# Altium PCB SMP ASCII.PcbDoc
Units mil, origin at the board's own origin, x right, y up, seen from the top; angles counter-clockwise.
Board outline 1574.8 x 334.65 mil, 2 copper layers (Top Layer, Bottom Layer), stack 63.78 mil thick; 21 components, 11 nets, 62 pads, 30 vias.
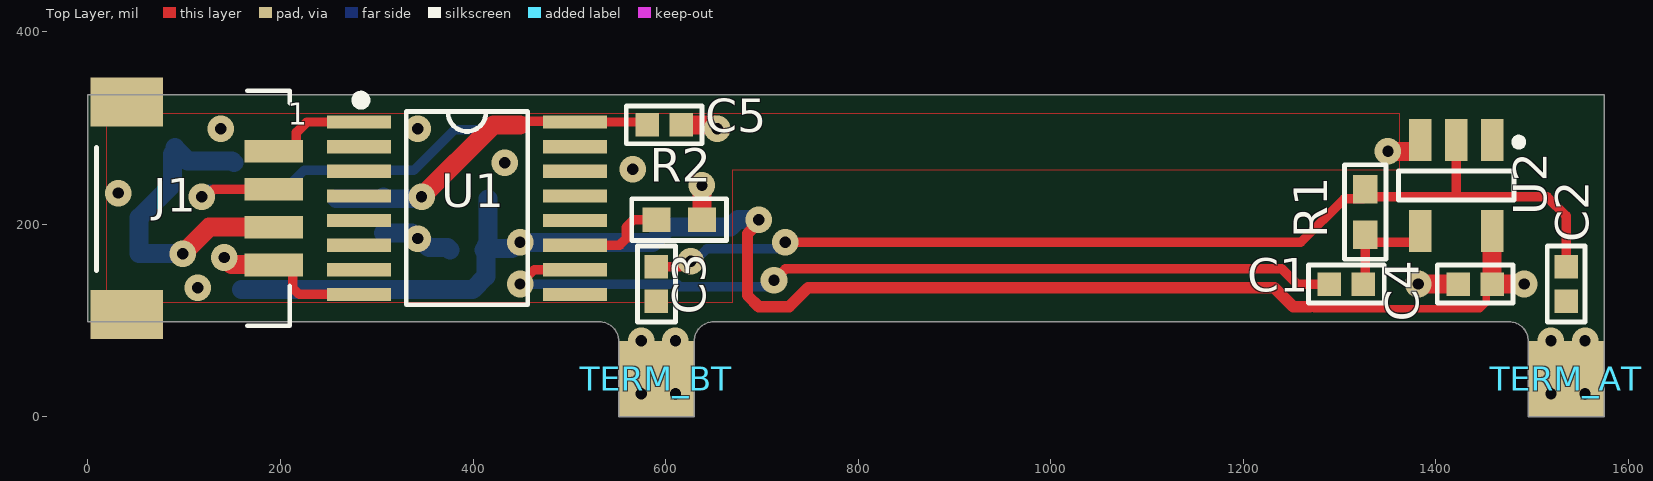
[diagram p0: Top Layer view]
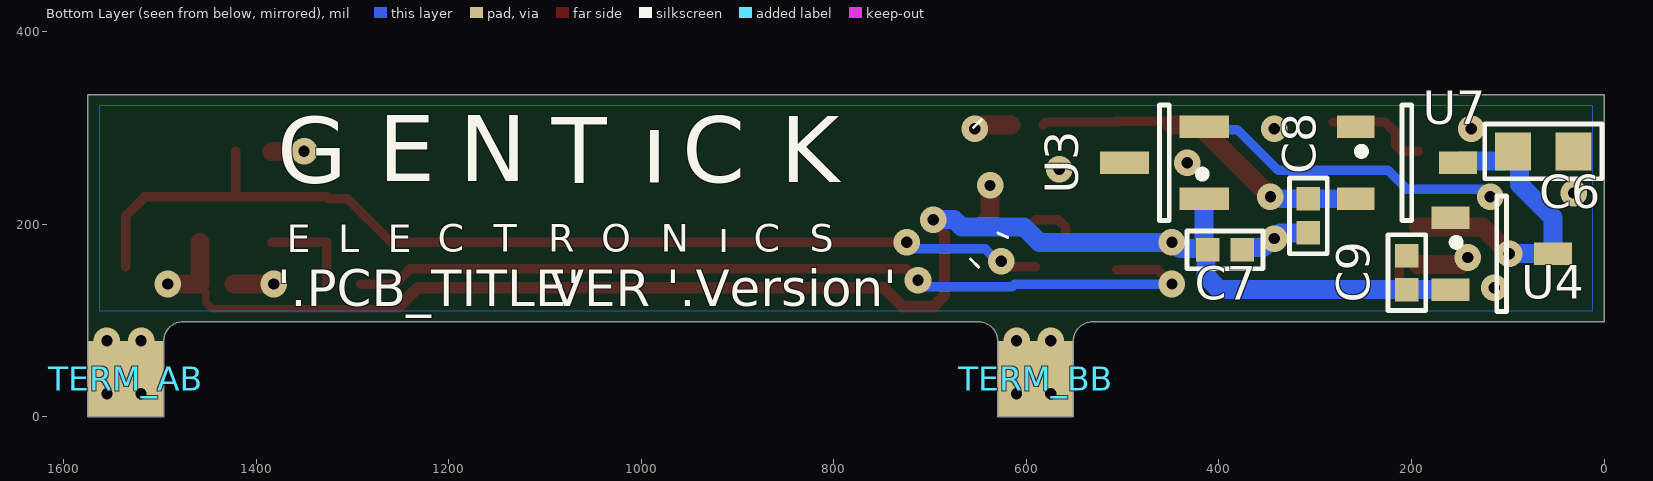
[diagram p1: Bottom Layer view, seen from below]

## Layer stack, top to bottom
Top Solder: solder mask 0.4, Solder Resist, Dk 3.5
Top Layer: signal copper 1.378
Dielectric1: core 61.024, FR-4, Dk 4.2
Bottom Layer: signal copper 1.378
Bottom Solder: solder mask 0.4, Solder Resist, Dk 3.5

## Board outline
551.18,78.74 ccw(c531.5,78.74) 531.5,98.43 0,98.43 0,334.65 1574.8,334.65 1574.8,0 1496.06,0 1496.06,78.74 ccw(c1476.38,78.74) 1476.38,98.43 649.61,98.43 ccw(c649.61,78.74) 629.92,78.74 629.92,0 551.18,0

## Design rules (kind name [scope] priority, off if disabled: settings)
AssemblyTestPointUsage [All] p0: scope1count=1 scope1_0_kind=Board scope1_0_value=Board scope2count=1 scope2_0_kind=Board scope2_0_value=Board commentlength=0
AssemblyTestpoint [All] p0: scope1count=1 scope1_0_kind=Board scope1_0_value=Board scope2count=1 scope2_0_kind=Board scope2_0_value=Board commentlength=0
Clearance Clearance_1 [All] p0 off: scope1count=1 scope1_0_kind=Board scope1_0_value=Board scope2count=1 scope2_0_kind=Board scope2_0_value=Board commentlength=97 gap=7.87 // Protel DXP Scope 1 Expression Was: InNamedPolygon('TOP - GND') Or InNamedPolygon('BOT - GND')
Clearance [All] p0: scope1count=1 scope1_0_kind=Board scope1_0_value=Board scope2count=1 scope2_0_kind=Board scope2_0_value=Board commentlength=0 gap=7.87
Clearance Clearance_1 [InNamedPolygon('TOP - GND') Or InNamedPolygon('BOT - GND')] p1: gap=7.87 ignorepadtopadclearanceinfootprint=FALSE
Clearance [All] p2: gap=7.87 ignorepadtopadclearanceinfootprint=FALSE except(0: Arc-Hole Track-Hole SMDPad-Hole THPad-Hole Via-Hole Fill-Hole Poly-Hole Region-Hole Text-Hole)
ComponentClearance [All] p0: scope1count=1 scope1_0_kind=Board scope1_0_value=Board scope2count=1 scope2_0_kind=Board scope2_0_value=Board commentlength=0 gap=10 collisioncheckmode=3
DiffPairsRouting [All] p0: scope1count=1 scope1_0_kind=Board scope1_0_value=Board scope2count=1 scope2_0_kind=Board scope2_0_value=Board commentlength=0
FabricationTestPointUsage TestPointUsage [All] p0: scope1count=1 scope1_0_kind=Board scope1_0_value=Board scope2count=1 scope2_0_kind=Board scope2_0_value=Board commentlength=0 valid=0 allowmultiple=FALSE
FabricationTestPointUsage TestPointUsage [All] p1: valid=0 allowmultiple=FALSE
FabricationTestpoint Testpoint [All] p0: scope1count=1 scope1_0_kind=Board scope1_0_value=Board scope2count=1 scope2_0_kind=Board scope2_0_value=Board commentlength=0 side=3 testpointundercomponent=TRUE minsize=40 maxsize=100 preferedsize=60 minholesize=0 maxholesize=40 preferedholesize=32 testpointgrid=1
FabricationTestpoint Testpoint [All] p1: side=3 testpointundercomponent=TRUE minsize=40 maxsize=100 preferedsize=60 minholesize=0 maxholesize=40 preferedholesize=32 testpointgrid=1 allowsidetop=TRUE allowsidebottom=TRUE usegrid=TRUE gridtolerance=0.01
FanoutControl Fanout_Default [All] p0: scope1count=1 scope1_0_kind=Board scope1_0_value=Board scope2count=1 scope2_0_kind=Board scope2_0_value=Board commentlength=30 // Fanout_Default (Default Rule)
FanoutControl Fanout_Small [All] p0 off: scope1count=1 scope1_0_kind=Board scope1_0_value=Board scope2count=1 scope2_0_kind=Board scope2_0_value=Board commentlength=84 // Protel DXP Scope 1 Expression Was: (CompPinCount < 5)   Fanout_Small (Default Rule)
FanoutControl Fanout_SOIC [All] p0 off: scope1count=1 scope1_0_kind=Board scope1_0_value=Board scope2count=1 scope2_0_kind=Board scope2_0_value=Board commentlength=71 // Protel DXP Scope 1 Expression Was: IsSOIC   Fanout_SOIC (Default Rule)
FanoutControl Fanout_LCC [All] p0 off: scope1count=1 scope1_0_kind=Board scope1_0_value=Board scope2count=1 scope2_0_kind=Board scope2_0_value=Board commentlength=69 // Protel DXP Scope 1 Expression Was: IsLCC   Fanout_LCC (Default Rule)
FanoutControl Fanout_BGA [All] p0 off: scope1count=1 scope1_0_kind=Board scope1_0_value=Board scope2count=1 scope2_0_kind=Board scope2_0_value=Board commentlength=69 // Protel DXP Scope 1 Expression Was: IsBGA   Fanout_BGA (Default Rule)
Height [All] p0: scope1count=1 scope1_0_kind=Board scope1_0_value=Board scope2count=1 scope2_0_kind=Board scope2_0_value=Board commentlength=0
HoleSize [All] p0: scope1count=1 scope1_0_kind=Board scope1_0_value=Board scope2count=1 scope2_0_kind=Board scope2_0_value=Board commentlength=0 absolutevalues=TRUE maxlimit=196.85 minlimit=9.84 maxpercent=80.000 minpercent=20.000
HoleSize [All] p1: absolutevalues=TRUE maxlimit=196.85 minlimit=9.84 maxpercent=80.000 minpercent=20.000
HoleToHoleClearance [All] p0: scope1count=1 scope1_0_kind=Board scope1_0_value=Board scope2count=1 scope2_0_kind=Board scope2_0_value=Board commentlength=0
LayerPairs [All] p0: scope1count=1 scope1_0_kind=Board scope1_0_value=Board scope2count=1 scope2_0_kind=Board scope2_0_value=Board commentlength=0 enforce=TRUE
MinimumSolderMaskSliver [All] p0: scope1count=1 scope1_0_kind=Board scope1_0_value=Board scope2count=1 scope2_0_kind=Board scope2_0_value=Board commentlength=0
NetAntennae [All] p0: scope1count=1 scope1_0_kind=Board scope1_0_value=Board scope2count=1 scope2_0_kind=Board scope2_0_value=Board commentlength=0
PasteMaskExpansion [All] p0: scope1count=1 scope1_0_kind=Board scope1_0_value=Board scope2count=1 scope2_0_kind=Board scope2_0_value=Board commentlength=0 expansion=0
PlaneClearance [All] p0: scope1count=1 scope1_0_kind=Board scope1_0_value=Board scope2count=1 scope2_0_kind=Board scope2_0_value=Board commentlength=0 clearance=19.68
PlaneClearance [All] p1: clearance=19.68
PlaneConnect [All] p0: scope1count=1 scope1_0_kind=Board scope1_0_value=Board scope2count=1 scope2_0_kind=Board scope2_0_value=Board commentlength=0 planeconnectstyle=Relief reliefexpansion=20 reliefentries=4 reliefconductorwidth=10 reliefairgap=10
PolygonConnect PolygonConnect_1 [All] p0 off: scope1count=1 scope1_0_kind=Board scope1_0_value=Board scope2count=1 scope2_0_kind=Board scope2_0_value=Board commentlength=97 connectstyle=Relief reliefconductorwidth=19.68 reliefentries=4 polygonreliefangle="90 Angle" // Protel DXP Scope 2 Expression Was: IsNamedPolygon('TOP - GND') Or IsNamedPolygon('BOT - GND')
PolygonConnect [All] p0: scope1count=1 scope1_0_kind=Board scope1_0_value=Board scope2count=1 scope2_0_kind=Board scope2_0_value=Board commentlength=0 connectstyle=Relief reliefconductorwidth=15.75 reliefentries=4 polygonreliefangle="90 Angle"
PolygonConnect PolygonConnectVia [All] p0 off: scope1count=1 scope1_0_kind=Board scope1_0_value=Board scope2count=1 scope2_0_kind=Board scope2_0_value=Board commentlength=44 connectstyle=Direct reliefconductorwidth=9.84 reliefentries=4 polygonreliefangle="90 Angle" // Protel DXP Scope 2 Expression Was: isvia
PolygonConnect PolygonConnect_1 [All vs IsNamedPolygon('TOP - GND') Or IsNamedPolygon('BOT - GND')] p1: thpad.connectstyle=Relief thpad.reliefconductorwidth=19.68 thpad.reliefentries=4 thpad.polygonreliefangle="90 Angle" thpad.airgapwidth=10 smdpad.connectstyle=Relief smdpad.reliefconductorwidth=10 smdpad.reliefentries=4 smdpad.polygonreliefangle="90 Angle" smdpad.airgapwidth=10 via.connectstyle=Direct via.reliefconductorwidth=10 via.reliefentries=4 via.polygonreliefangle="90 Angle" via.airgapwidth=10
PolygonConnect PolygonConnectVia [All vs isvia] p2: connectstyle=Direct reliefconductorwidth=9.84 reliefentries=4 polygonreliefangle="90 Angle" airgapwidth=10
PolygonConnect [All] p3: connectstyle=Relief reliefconductorwidth=15.75 reliefentries=4 polygonreliefangle="90 Angle" airgapwidth=10
RoutingCorners [All] p0: scope1count=1 scope1_0_kind=Board scope1_0_value=Board scope2count=1 scope2_0_kind=Board scope2_0_value=Board commentlength=0 cornerstyle=45-Degree minsetback=98.43 maxsetback=98.43
RoutingCorners [All] p1: cornerstyle=45-Degree minsetback=98.43 maxsetback=98.43
RoutingLayers [All] p0: scope1count=1 scope1_0_kind=Board scope1_0_value=Board scope2count=1 scope2_0_kind=Board scope2_0_value=Board commentlength=0 top layer=Automatic bottom layer=Automatic
RoutingPriority [All] p0: scope1count=1 scope1_0_kind=Board scope1_0_value=Board scope2count=1 scope2_0_kind=Board scope2_0_value=Board commentlength=0
RoutingTopology [All] p0: scope1count=1 scope1_0_kind=Board scope1_0_value=Board scope2count=1 scope2_0_kind=Board scope2_0_value=Board commentlength=0 topology=Shortest
RoutingVias [All] p0: scope1count=1 scope1_0_kind=Board scope1_0_value=Board scope2count=1 scope2_0_kind=Board scope2_0_value=Board commentlength=0 holewidth=11.81 width=27.56 viastyle="Through Hole" minholewidth=11.81 minwidth=27.56 maxholewidth=11.81 maxwidth=27.56
RoutingVias [All] p1: holewidth=11.81 width=27.56 viastyle="Through Hole" minholewidth=11.81 minwidth=27.56 maxholewidth=11.81 maxwidth=27.56
ShortCircuit [All] p0: scope1count=1 scope1_0_kind=Board scope1_0_value=Board scope2count=1 scope2_0_kind=Board scope2_0_value=Board commentlength=0 allowed=FALSE
SilkToBoardRegionClearance [All] p0: scope1count=1 scope1_0_kind=Board scope1_0_value=Board scope2count=1 scope2_0_kind=Board scope2_0_value=Board commentlength=0
SilkToSilkClearance [All] p0: scope1count=1 scope1_0_kind=Board scope1_0_value=Board scope2count=1 scope2_0_kind=Board scope2_0_value=Board commentlength=0
SilkToSolderMaskClearance SilkscreenOverComponentPads [All] p0 off: scope1count=1 scope1_0_kind=Board scope1_0_value=Board scope2count=1 scope2_0_kind=Board scope2_0_value=Board commentlength=44 // Protel DXP Scope 1 Expression Was: IsPad
SilkToSolderMaskClearance SilkscreenOverComponentPads [IsPad] p1: minsilkscreentomaskgap=10 clearancetoexposedcopper=TRUE
SolderMaskExpansion [All] p0: scope1count=1 scope1_0_kind=Board scope1_0_value=Board scope2count=1 scope2_0_kind=Board scope2_0_value=Board commentlength=0 expansion=1.97
SolderMaskExpansion [All] p1: expansion=1.97 istentingtop=FALSE
UnRoutedNet [All] p0: scope1count=1 scope1_0_kind=Board scope1_0_value=Board scope2count=1 scope2_0_kind=Board scope2_0_value=Board commentlength=0
UnpouredPolygon [All] p0: scope1count=1 scope1_0_kind=Board scope1_0_value=Board scope2count=1 scope2_0_kind=Board scope2_0_value=Board commentlength=0
Width [All] p0: scope1count=1 scope1_0_kind=Board scope1_0_value=Board scope2count=1 scope2_0_kind=Board scope2_0_value=Board commentlength=0 maxlimit=78.74 minlimit=7.87 preferedwidth=9.84
Width [All] p1: maxlimit=78.74 minlimit=7.87 preferedwidth=9.84
24 further rules are at their usual default settings.

## Components (designator, comment, footprint, x,y, rotation, side; value= is the part's Value field where it differs from the comment)
C1 "100pF_C0402_50V_10%_C0G/NP0" CAPC0402X60N 1307.09,137.8 r180 top
C2 "10pF_C0402_50V_5%_C0G/NP0" CAPC0402X60N 1535.43,137.8 r90 top
C3 "4.7pF_C0402_50V_5%_C0G/NP0" CAPC0402X60N 590.55,137.8 r270 top
C4 "100nF_C0402_50V_5%_X5R" CAPC0402X60N 1440.94,137.8 r180 top
C5 "100nF_C0402_50V_5%_X5R" CAPC0402X60N 598.43,303.15 r0 top
C6 "10uF_C0603_25V_10%_X5R" CAPC0603X85N 62.99,275.59 r180 bottom
C7 "100nF_C0402_50V_5%_X5R" CAPC0402X60N 393.7,173.23 r180 bottom
C8 "100nF_C0402_50V_5%_X5R" CAPC0402X60N 307.09,208.66 r270 bottom
C9 "100nF_C0402_50V_5%_X5R" CAPC0402X60N 204.72,149.61 r90 bottom
J1 "SM04B-SRSS-TB" SM04B-SRSS-TB 40.35,216.54 r270 top
R1 "200R_R0402_1%" RESC0402X40N 1326.77,212.6 r90 top
R2 "200R_R0402_1%" RESC0402X40N 614.17,204.72 r180 top
TERM_AB "Pad-SMD-2.0x2.0mm-H_Rectangle" "PAD-SMD-2.0x2.0mm Rect" 1535.43,39.37 r90 bottom
TERM_AT "Pad-SMD-2.0x2.0mm-H_Rectangle" "PAD-SMD-2.0x2.0mm Rect" 1535.43,39.37 r90 top
TERM_BB "Pad-SMD-2.0x2.0mm-H_Rectangle" "PAD-SMD-2.0x2.0mm Rect" 590.55,39.37 r90 bottom
TERM_BT "Pad-SMD-2.0x2.0mm-H_Rectangle" "PAD-SMD-2.0x2.0mm Rect" 590.55,39.37 r90 top
U1 "74LV4040APWR" TSSOP16-4.5x5.0 393.7,216.54 r0 top
U2 "74AHC1G14DBVR" SOT23-5 1421.26,240.16 r270 top
U3 "MCP9700BT-H/TT" SOT23 456.69,263.78 r0 bottom
U4 "MCP1703T-5002E/CB" SOT23A 106.3,169.29 r180 bottom
U7 "" SOT23A 204.72,263.78 r180 bottom

## Footprints (in the part's own frame and the unit in brackets; to place one, negate y for a bottom-side part, rotate by r counter-clockwise, add the part's x,y. Pads: shape width x height; smd on the part's side, far side on the other; paste and mask are expansions set on the pad)
CAPC0402X60N [mm] "Chip Capacitor, 0402, 2-Leads, Body 1.0x0.5mm, IPC Medium Density"
  rect 0.62x0.62 smd paste+0 mask+0: 1(-0.45,0) 2(0.45,0)
  silkscreen extent -1,-0.5 1,0.5
CAPC0603X85N [mm] "Chip Capacitor, 0603, 2-Leads, Body 1.6x0.8mm, IPC Medium Density"
  rect 0.95x1 smd paste+0 mask+0: 1(-0.8,0) 2(0.8,0)
  silkscreen extent -1.55,-0.72 1.55,0.72
"PAD-SMD-2.0x2.0mm Rect" [mm] "Pad SMD, 2.0x2.0mm Rect"
  rect 2x2 smd paste-2.5 mask+0: 1(0,0)
RESC0402X40N [mm] "Chip Resistor, 0402, 2-Leads, Body 1.1x0.5mm, IPC Medium Density"
  rect 0.75x0.65 smd paste+0 mask+0: 1(-0.6,0) 2(0.6,0)
  silkscreen extent -1.25,-0.55 1.25,0.55
SM04B-SRSS-TB [mm] "SM04B-SRSS-TB 1.0mm Pitch"
  rect 0.6x1.55 smd: 1(-1.5,3.875) 2(-0.5,3.875) 3(0.5,3.875) 4(1.5,3.875)
  rect 1.295x1.905 smd: M1(-2.8,0) M2(2.8,0)
  silkscreen extent -3.1,-0.8 3.1,4.3
SOT23 [mm] "SOT23, 3-Leads, Body 3.0x1.4mm (max), Pitch 0.95mm, IPC Medium Density"
  rect 1.3x0.6 smd mask+0: 1(-1.05,0.95) 2(-1.05,-0.95) 3(1.05,0)
  silkscreen extent -1.07,-1.52 0.13,1.52
SOT23-5 [mm] "SOT23, 5-Leads, Body 3.0x1.7mm (max), Pitch 0.95mm, IPC Medium Density"
  rect 1.1x0.6 smd mask+0: 1(-1.2,0.95) 2(-1.2,0) 3(-1.2,-0.95) 4(1.2,-0.95) 5(1.2,0.95)
  silkscreen extent -1.21,-1.52 0.38,1.72
SOT23A [mm] "SOT23A 3.0x1.4mm"
  rect 1x0.6 smd mask+0: 1(-1.35,0.95) 2(-1.35,-0.95) 3(1.35,0)
  silkscreen extent -1.27,-1.52 0.13,1.52
TSSOP16-4.5x5.0 [mm] "TSSOP, 16-Leads, Body 5.1x4.5mm (max), Pitch 0.65mm, IPC Medium Density"
  rect 1.7x0.35 smd paste+0 mask+0: 1(-2.85,2.275) 2(-2.85,1.625) 3(-2.85,0.975) 4(-2.85,0.325) 5(-2.85,-0.325) 6(-2.85,-0.975) 7(-2.85,-1.625) 8(-2.85,-2.275) 9(2.85,-2.275) 10(2.85,-1.625) 11(2.85,-0.975) 12(2.85,-0.325) 13(2.85,0.325) 14(2.85,0.975) 15(2.85,1.625) 16(2.85,2.275)
  silkscreen extent -2.92,-2.55 1.6,2.97

## Part data
C1: library part 100pF_0402N_50V_10%_C0G/NP0, "Cap Ceramic C0G/NP0"
C2: library part 10pF_0402N_50V_5%_C0G/NP0, "Cap Ceramic C0G/NP0"
C3: library part 4.7pF_0402N_50V_5%_C0G/NP0, "Cap Ceramic C0G/NP0"
C4 C5 C7 C8 C9: library part 100nF_0402N_50V_5%_X5R, "Cap Ceramic X5R"
C6: library part 10uF_0603N_25V_10%_X5R, "Cap Ceramic X5R"
J1: "Connector Wire to Board 1.0mm Rt Angle"
R1 R2: library part 200R_0402, "Resistor Chip SMD"
TERM_AB TERM_AT TERM_BB TERM_BT: library part Pad-SMD-2.0x2.0mm_Rectangle, "Surface Mount Pad 2.0x2.0mm Rectangle"
U1: library part 74LV4040APWR_TSSOP16, "IC 12-Bit Binary Ripple Counter"
U2: library part 74AHC1G14DBVR_SOT23-5, "IC Single Schmitt-Trigger Inverter"
U3: library part MCP9700BT-h/TT-SOT23, "IC Temperature Sensor -40 to 150 C"
U4 U7: library part MCP1703T-5002E/CB_SOT23A, "Voltage Regulator LDO 250mA"

## Via types
v1: diameter 27.56, hole 11.81, Top Layer to Bottom Layer, tented both sides, 30 vias

## Nets (pads, with @x,y where several pads share a name; then routed paths per layer and width w, separated by ;. In a path a pad name is that pad's centre, name@x,y a point inside that pad or via, vN(x,y) a via of type N, cw(c..) or ccw(c..) an arc to the next point about the centre after c; other vN are vias at no path point)
+3V3: C4.1 C7.1 C9.1 U2.5 U3.1 U4.2 | length 1609.1
  Top Layer w7.87: 1269.1,114.17 1271.88,114.17 1273.85,112.2 1445.73,112.2 1452.31,118.79 1452.31,129.53 1460.57,137.8 C4.1@1460.63,137.8
  Top Layer w11.81: v1(696.85,204.72) 696.85,201.74 685.04,189.93 685.04,125.98 696.85,114.17 728.35,114.17 748.03,133.86 1232.28,133.86 1251.97,114.17 1269.1,114.17
  Top Layer w19.68: U2.5@1458.66,181.1 C4.1 1460.63,137.8 v1(1492.13,137.8)
  Bottom Layer w19.68: U4.2 C9.1 399.61,131.89 413.39,145.67 C7.1@413.39,173.23 ; C7.1 412.84,174.65 440.23,174.65 446.69,181.1 v1(448.82,181.1) 586.61,181.1 602.36,196.85 667.16,196.85 675.03,204.72 v1@695.34,204.72 ; C7.1@413.39,177.17 415.35,179.13 U3.1
+5V: C5.1 C8.1 U1.16 U7.2 | length 362.2
  Top Layer w9.84: 448.82,303.15 452.76,307.09 U1.16@507.87,307.09 ; U1.16 579.72,306.1 C5.1@582.68,303.15
  Top Layer w19.68: v1(346.46,228.35) 421.26,303.15 448.82,303.15
  Bottom Layer w19.68: U7.2 305.12,226.38 C8.1@307.09,228.35 ; C8.1 344.49,226.38 v1(346.46,228.35)
GND: C3.2 C4.2 C5.2 C6.2 C7.2 C8.2 C9.2 J1.4 R2.1 TERM_BB.1 TERM_BT.1 U1.8 U2.3 U3.3 U4.1 U7.1 | length 381.5
  Top Layer w9.84: J1.4@212.6,157.48 212.6,133.86 219.49,126.97 U1.8
  Top Layer w19.68: v1(141.73,165.35) 148.9,158.18 192.21,158.18 J1.4 ; C5.2 649.61,303.15 v1(653.54,299.21) ; v1(637.8,240.16) R2.1 639.76,204.72 R2.1@642.72,201.77 ; v1(1350.39,275.59) U2.3@1383.86,275.59 ; v1(1381.89,137.8) C4.2
  Bottom Layer w19.68: C8.2 336.61,190.94 v1(342.52,185.04) 344.65,185.04 354.1,175.59 373.62,175.59 C7.2
  other v1: 574.8,23.62 610.24,23.62 574.8,78.74 610.24,78.74 114.17,133.86 31.5,232.28 565.9,256.93 433.07,263.78 137.8,299.21 342.52,299.21
NetC1_1: C1.1 R1.1 U2.4 | length 104.3
  Top Layer w9.84: C1.1@1326.77,133.86 1326.77,181.1 U2.4@1383.86,181.1
NetC1_2: C1.2 U1.10 | length 921.2
  Top Layer w9.84: v1(448.82,137.8) 463.58,152.56 U1.10 ; v1(712.6,141.73) 724.41,153.54 1240.16,153.54 1255.91,137.8 C1.2 C1.2@1291.34,137.8
  Bottom Layer w9.84: v1(448.82,137.8) 612.02,137.8 614.98,134.84 705.71,134.84 v1(712.6,141.73)
NetC2_1: C2.1 TERM_AB.1 TERM_AT.1
  other v1: 1519.69,23.62 1555.12,23.62 1519.69,78.74 1555.12,78.74
NetC2_2: C2.2 C3.1 R1.2 U2.2 | length 1075.7
  Top Layer w9.84: C3.1 615.28,155.51 621.19,161.42 v1@622.05,161.42 ; v1(724.41,181.1) 1259.84,181.1 1304.98,226.24 1324.66,226.24 1326.77,228.35 1421.26,228.35 ; U2.2@1421.26,275.59 1421.26,228.35 ; C2.2 1535.43,208.66 1515.75,228.35 1421.26,228.35
  Bottom Layer w9.84: v1@629.92,161.42 642.72,174.21 717.52,174.21 v1(724.41,181.1)
  other v1: 625.98,161.42
NetR2_2: R2.2 U1.11 | length 102.6
  Top Layer w9.84: U1.11 552.17,178.15 559.06,185.04 559.06,196.85 566.79,204.58 590.41,204.58 R2.2
OUT: J1.1 U1.1 | length 108.7
  Top Layer w9.84: J1.1 209.65,275.59 216.54,282.48 216.54,295.28 227.36,306.1 U1.1
TEMP_OUT: J1.2 U3.2 | length 405.5
  Top Layer w9.84: v1(118.11,228.35) 122.9,228.35 130.78,236.22 J1.2
  Bottom Layer w9.84: v1(118.11,228.35) 125.98,236.22 204.72,236.22 224.41,255.91 338.58,255.91 380.77,298.09 412.26,298.09 U3.2
VIN: C6.1 J1.3 U4.3 U7.3 | length 341.1
  Top Layer w19.68: v1(98.43,169.29) 125.98,196.85 J1.3
  Bottom Layer w19.68: C6.1@90.55,275.59 87.88,272.92 87.88,241.42 53.15,206.69 U4.3 v1(98.43,169.29) ; C6.1@90.55,279.53 90.55,278.54 103.35,265.75 149.61,265.75 U7.3
pads on no net: J1.M1 J1.M2 U1.2 U1.3 U1.4 U1.5 U1.6 U1.7 U1.9 U1.12 U1.13 U1.14 U1.15 U2.1

## Polygon pours and split planes (outlines as drawn)
GND on Top Layer "TOP - GND" (solid, remove dead copper, pour order 0): 19.69,118.11 19.69,314.96 1362.2,314.96 1362.2,255.91 669.29,255.91 669.29,118.11
GND on Bottom Layer "BOT - GND" (solid, pour order 4): 11.81,110.24 11.81,322.83 1562.99,322.83 1562.99,110.24

## Silkscreen, mask and mechanical layers (free items; w line width, h text height)
Bottom Overlay:
  lines w3.09: 619.39,186.16 629.72,190.78 ; 646.57,308.51 654.88,300.4 ; 649.63,155.11 658.19,163.85
  text "N" at 1189.41,222.2 h117.54
  text "E" at 1273.13,222.2 h117.54
  text "K" at 855.48,221.13 h117.54
  text "C" at 957.62,221.13 h117.54
  text "I" at 1000.09,221.37 h117.54
  text "G" at 1377.95,220.47 h117.54
  text "T" at 1093.29,219.95 h117.54
  text "S" at 824.84,161.42 h49.49
  text "C" at 882.98,161.42 h49.49
  text "I" at 919.91,161.42 h49.49
  text "N" at 979.62,161.42 h49.49
  text "O" at 1041.69,161.42 h49.49
  text "R" at 1096.68,161.42 h49.49
  text "T" at 1153.25,161.42 h49.49
  text "C" at 1211.39,161.42 h49.49
  text "E" at 1263.32,161.1 h49.49
  text "L" at 1314.61,161.1 h49.49
  text "E" at 1368.16,161.1 h49.49
  text "VER '.Version'" at 1094.49,102.36 h65
  text "'.PCB_TITLE'" at 1377.95,102.36 h65
Board:
  the board outline again, w2

## Text inside footprints (layer, text, board x,y; h text height)
J1: Top Overlay "1" at 207.68,295.28 h39.37
TERM_AB: Bot 3D "MCP1703T-5002E/CB" at 257.22,98.28 h60